# Altium PCB GY-G11.PCBDOC (part 5 of 7)
Units mm, origin at the board's own origin, x right, y up, seen from the top; angles counter-clockwise.
Board outline 170.4 x 114.15 mm, 2 copper layers (Top Layer, Bottom Layer); 364 components, 260 nets, 1285 pads, 753 vias.
Unrouted connection lines stored in the file: 2.
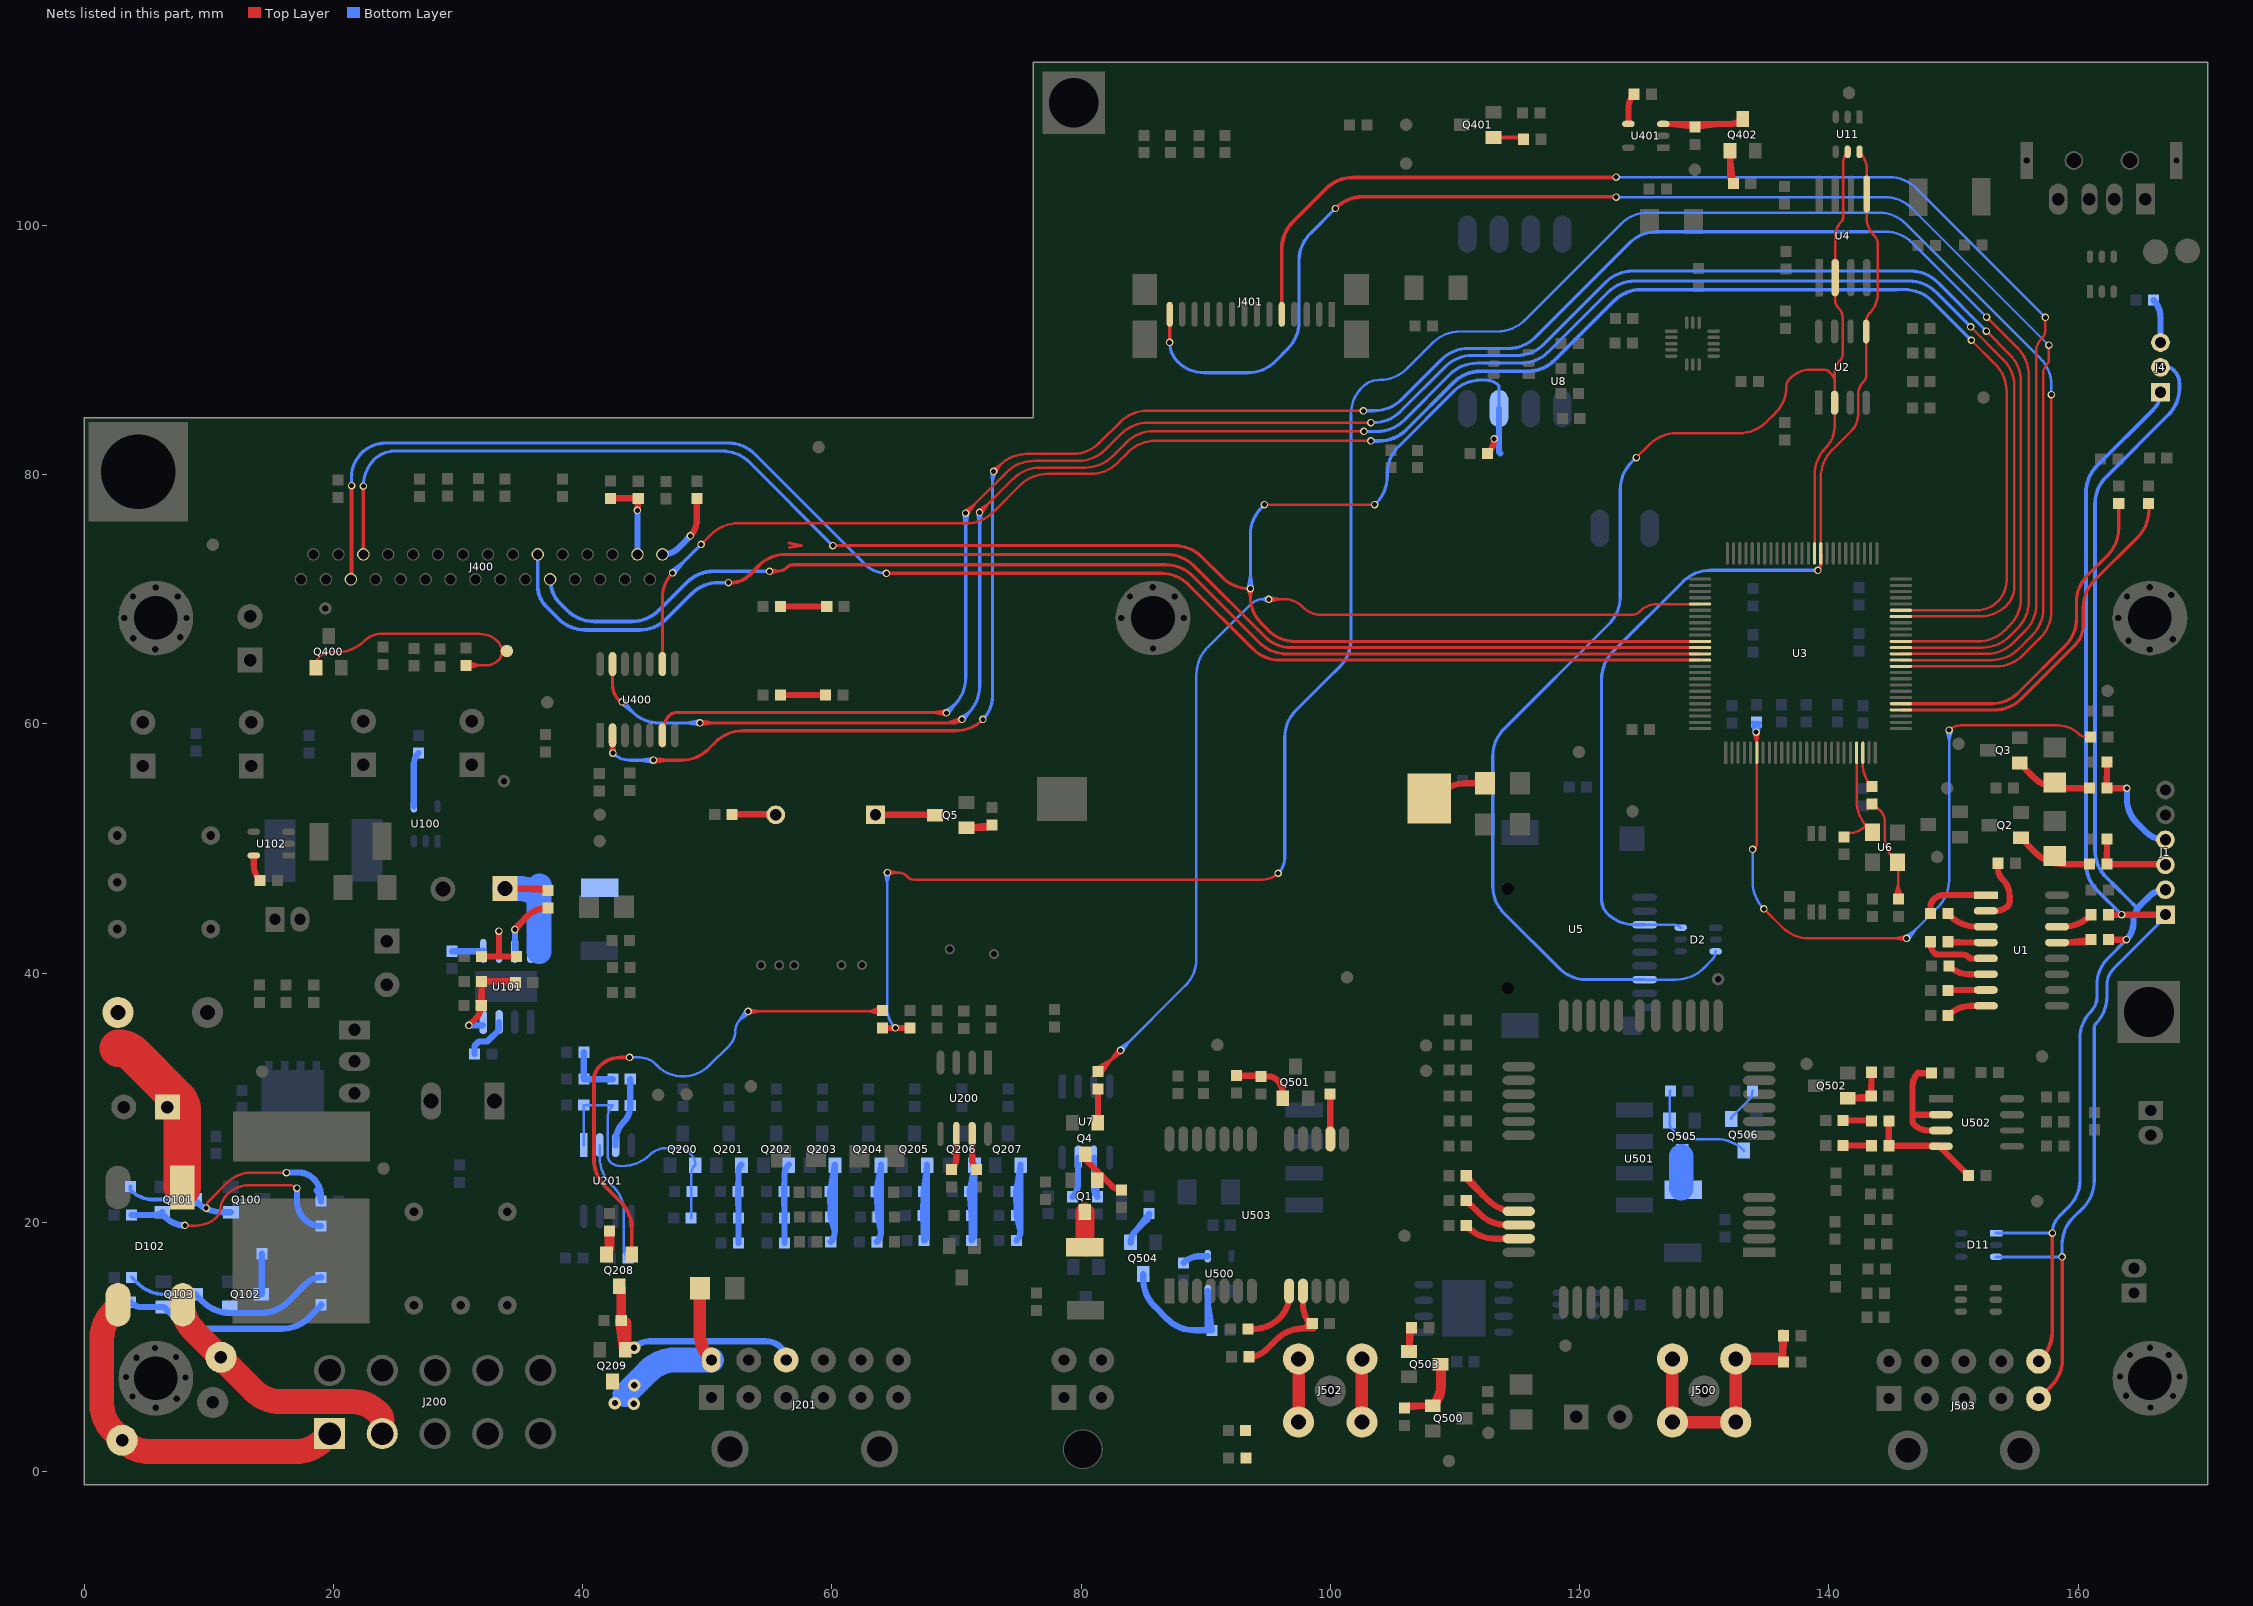
[diagram p5: the nets of this part, all layers, seen from the top]

## Via types
v1: diameter 0.6, hole 0.4, Top Layer to Bottom Layer, 620 vias
v2: diameter 0.8, hole 0.5, Top Layer to Bottom Layer, 121 vias
v3: diameter 1, hole 0.5, Top Layer to Bottom Layer, 10 vias
v4: diameter 1.27, hole 0.711, Top Layer to Bottom Layer, 2 vias

## Nets (pads, with @x,y where several pads share a name; then routed paths per layer and width w, separated by ;. In a path a pad name is that pad's centre, name@x,y a point inside that pad or via, vN(x,y) a via of type N, cw(c..) or ccw(c..) an arc to the next point about the centre after c; other vN are vias at no path point) (continued)
MCOA1: U3.39 U400.2 | length 188.9
  Top Layer w0.2: v1@72.859,80.42 73.492,80.772 ; v1(72.98,80.26) 73.492,80.772 ; v1@73.14,80.139 73.492,80.772 ; v1(102.651,85.13) 85.31,85.13 ccw(c85.31,82.064) 83.142,84.232 81.478,82.568 cw(c79.31,84.736) 79.31,81.67 75.66,81.67 ccw(c75.66,78.604) 73.492,80.772 ; U3.39@145.776,66.124 152.312,66.124 ccw(c152.312,69.19) 154.48,67.022 155.131,67.672 ccw(c152.963,69.84) 156.029,69.84 156.029,88 ccw(c152.963,88) 155.131,90.168 v1(152.65,92.648)
  Top Layer w0.254: v1@42.247,57.67 U400.2@42.394,58.723 ; v1@42.394,57.722 U400.2@42.394,59.093 ; v1(42.42,57.66) U400.2@42.394,58.723 ; v1@42.592,57.678 U400.2@42.394,58.723 ; v1(45.68,57.09) 47.93,57.09 ccw(c47.93,60.156) 50.098,57.988 50.662,58.552 cw(c52.83,56.384) 52.83,59.45 69.93,59.45 ccw(c69.93,62.516) 72.098,60.348 v1(72.11,60.36) ; v1@45.694,56.918 46.742,57.09 v1@45.694,57.262
  Bottom Layer w0.2: v1@72.794,80.342 72.88,79.43 v1@73.164,80.252 ; 143.08,99.5 144.528,99.5 cw(c144.528,96.434) 146.696,98.602 v1(152.65,92.648)
  Bottom Layer w0.254: v1(42.42,57.66) ccw(c43.796,59.036) 43.796,57.09 v1(45.68,57.09) ; v1@45.666,56.918 44.618,57.09 v1@45.666,57.262 ; v1@72.229,60.409 cw(c72.11,60.529) v1(72.11,60.36) ccw(c70.251,62.219) 72.88,62.219 72.88,79.43 cw(c75.946,79.43) v1@72.993,80.256 ; v1(102.651,85.13) 103.52,85.13 ccw(c103.52,88.196) 105.688,86.028 108.893,89.232 cw(c111.061,87.064) 111.061,90.13 114.271,90.13 ccw(c114.271,93.196) 116.439,91.028 124.012,98.602 cw(c126.18,96.434) 126.18,99.5 143.08,99.5
MCOA2: U3.44 U400.13 | length 183.1
  Top Layer w0.2: v1@71.713,77.125 72.564,77.694 v1@71.995,76.843 ; v1(71.84,76.97) 74.542,79.672 cw(c76.71,77.504) 76.71,80.57 80.33,80.57 ccw(c80.33,83.636) 82.498,81.468 83.622,82.592 cw(c85.79,80.424) 85.79,83.49 102.643,83.49 cw(c102.643,83.423) v1(102.691,83.47) ; U3.44@145.776,68.624 152.094,68.624 ccw(c152.094,71.69) 154.262,69.522 ccw(c152.769,71.015) 154.88,71.015 154.88,87.088 ccw(c151.814,87.088) 153.982,89.256 v1(151.37,91.868)
  Top Layer w0.254: U400.13@42.394,64.808 42.394,63.126 ccw(c44.086,63.126) 42.89,61.93 42.948,61.872 ccw(c43.17,62.094) v1(43.17,61.78) ; v1(49.4,60.08) 69.744,60.08 ccw(c69.744,61.036) v1(70.42,60.36) ; v1@49.414,59.908 50.462,60.08 v1@49.414,60.252 ; 69.3,60.08 v1@70.449,60.503
  Bottom Layer w0.254: v1@43.057,61.649 43.972,60.978 ; v1(43.17,61.78) 43.972,60.978 ; v1@43.301,61.893 43.972,60.978 ; v1@49.386,59.908 48.338,60.08 v1@49.386,60.252 ; v1(49.4,60.08) 46.14,60.08 cw(c46.14,63.146) 43.972,60.978 ; v1@70.312,60.495 70.962,60.902 ; v1(70.42,60.36) 70.962,60.902 ; v1@70.555,60.252 70.962,60.902 ; v1@71.668,76.953 71.86,75.907 ; v1(71.84,76.97) 71.86,75.907 ; v1@71.86,76.97 71.86,63.07 cw(c68.794,63.07) 70.962,60.902 ; v1@72.013,76.959 71.86,75.907 ; v1(102.691,83.47) 103.741,83.47 ccw(c103.741,86.536) 105.909,84.368 109.593,88.052 cw(c111.761,85.884) 111.761,88.95 115.311,88.95 ccw(c115.311,92.016) 117.479,89.848 122.272,94.642 cw(c124.44,92.474) 124.44,95.54 146.428,95.54 cw(c146.428,92.474) 148.596,94.642 v1(151.37,91.868)
MCOB1: U3.40 U400.6 | length 175.7
  Top Layer w0.2: v1@70.603,77.065 71.454,77.634 v1@70.885,76.783 ; v1(70.73,76.91) 74.032,80.212 cw(c76.2,78.044) 76.2,81.11 79.77,81.11 ccw(c79.77,84.176) 81.938,82.008 83.202,83.272 cw(c85.37,81.104) 85.37,84.17 v1(103.251,84.17) ; U3.40@145.776,66.624 151.962,66.624 ccw(c151.962,69.69) 154.13,67.522 154.501,67.892 ccw(c152.333,70.06) 155.399,70.06 155.399,87.49 ccw(c152.333,87.49) 154.501,89.658 v1(152.63,91.528)
  Top Layer w0.254: U400.6@46.394,59.093 46.394,59.296 cw(c48.394,59.296) 46.98,60.71 cw(c47.463,60.227) 47.463,60.91 v1@69.132,60.91 ; v1@69.163,60.718 68.117,60.91 ; v1@69.169,61.063 68.117,60.91 ; v1(69.18,60.89) 68.117,60.91
  Bottom Layer w0.254: v1@69.069,61.023 69.842,61.552 ; v1(69.18,60.89) 69.842,61.552 ; v1@69.313,60.779 69.842,61.552 ; v1@70.558,76.894 70.74,75.848 ; v1(70.73,76.91) 70.74,75.848 ; v1@70.74,76.91 70.74,63.72 cw(c67.674,63.72) 69.842,61.552 ; v1@70.903,76.898 70.74,75.848 ; v1(103.251,84.17) 103.44,84.17 ccw(c103.44,87.236) 105.608,85.068 109.213,88.672 cw(c111.381,86.504) 111.381,89.57 114.951,89.57 ccw(c114.951,92.636) 117.119,90.468 122.092,95.442 cw(c124.26,93.274) 124.26,96.34 146.548,96.34 cw(c146.548,93.274) 148.716,95.442 v1(152.63,91.528)
MCOB2: U3.45 U400.9 | length 154
  Top Layer w0.2: v1(49.51,74.41) 50.302,75.202 cw(c52.47,73.034) 52.47,76.1 70.78,76.1 ccw(c70.78,79.166) 72.948,76.998 75.112,79.162 cw(c77.28,76.994) 77.28,80.06 80.75,80.06 ccw(c80.75,83.126) 82.918,80.958 83.782,81.822 cw(c85.95,79.654) 85.95,82.72 103.227,82.72 cw(c103.227,82.687) v1(103.251,82.71) ; U3.45@145.776,69.124 151.845,69.124 ccw(c151.845,71.535) 153.55,69.83 ccw(c151.86,71.52) 154.25,71.52 154.25,86.688 ccw(c151.184,86.688) 153.352,88.856 v1(151.42,90.788)
  Top Layer w0.254: U400.9@46.394,64.808 46.394,70.127 cw(c49.213,70.127) v1(47.22,72.12)
  Bottom Layer w0.254: v1@47.107,72.251 48.059,72.959 v1@47.351,72.007 ; v1(47.22,72.12) v1(49.51,74.41) ; 145.39,94.85 146.088,94.85 cw(c146.088,91.784) 148.256,93.952 v1(151.42,90.788)
  Bottom Layer w0.3: v1(103.251,82.71) 103.921,82.71 ccw(c103.921,85.776) 106.089,83.608 109.883,87.402 cw(c112.051,85.234) 112.051,88.3 115.831,88.3 ccw(c115.831,91.366) 117.999,89.198 122.752,93.952 cw(c124.92,91.784) 124.92,94.85 145.39,94.85
MISO: D2.3 U2.2 U3.61 U4.2 U5.7 U11.5 | length 114.3
  Top Layer w0.2: v1(124.54,81.37) 125.602,82.432 cw(c127.77,80.264) 127.77,83.33 132.8,83.33 ccw(c132.8,86.396) 134.968,84.228 135.746,85.006 ccw(c133.731,87.02) 136.58,87.02 cw(c137.594,87.02) 136.877,87.737 cw(c138.526,86.088) 138.526,88.42 139.638,88.42 cw(c139.638,87.908) 140,88.27 140.211,88.059 cw(c139.632,87.48) 140.451,87.48 ; U3.61@138.846,73.684 138.846,79.97 cw(c141.973,79.97) 139.762,82.182 ccw(c138.098,83.845) 140.451,83.845 140.451,88.1 cw(c141.95,88.1) 140.89,89.16 ccw(c140.335,89.715) 141.12,89.715 141.12,92.474 ccw(c139.754,92.474) 140.72,93.44 cw(c141.271,93.991) 140.492,93.991 140.492,99.055 cw(c142.295,99.055) 141.02,100.33 ccw(c140.754,100.596) 141.13,100.596 141.13,105.019 cw(c142.384,105.019) U11.5@141.497,105.906
  Bottom Layer w0.2: U5.7@125.213,39.487 127.757,39.487 ccw(c127.757,42.553) 129.925,40.385 130.633,41.093 ccw(c129.975,41.752) D2.3@130.906,41.752
  Bottom Layer w0.254: v1(124.54,81.37) 124.148,80.978 ccw(c126.316,78.81) 123.25,78.81 123.25,70.19 cw(c120.184,70.19) 122.352,68.022 113.918,59.588 ccw(c116.086,57.42) 113.02,57.42 113.02,47 ccw(c116.086,47) 113.918,44.832 118.365,40.385 ccw(c120.533,42.553) 120.533,39.487 U5.7@125.213,39.487
MISO0: J401.14 U3.37 | length 123.4
  Top Layer w0.2: U3.37@145.776,65.124 153.062,65.124 ccw(c153.062,68.19) 155.23,66.022 156.301,67.092 ccw(c154.133,69.26) 157.199,69.26 157.199,88.107 cw(c158.329,88.107) 157.304,88.582 cw(c158.329,88.107) 157.53,88.906 ccw(c157.264,89.172) 157.64,89.172 v1(157.64,90.388)
  Top Layer w0.3: v1(87.1,90.61) ccw(c87.099,90.611) 87.101,90.611 J401.14@87.101,92.87 ; v1(100.39,101.36) 100.432,101.402 cw(c102.6,99.234) 102.6,102.3 v1@122.872,102.3
  Bottom Layer w0.2: v1(122.92,102.28) 144.478,102.28 cw(c144.478,99.214) 146.646,101.382 v1(157.64,90.388)
  Bottom Layer w0.254: v1(87.1,90.61) ccw(c89.297,90.61) 87.743,89.057 ccw(c89.86,91.173) 89.86,88.18 93.38,88.18 ccw(c93.38,91.246) 95.548,89.078 96.582,90.112 ccw(c94.414,92.28) 97.48,92.28 97.48,97.18 cw(c100.546,97.18) 98.378,99.348 v1(100.39,101.36)
MOSI: D2.6 U2.5 U3.60 U4.5 U5.3 U11.6 | length 81.6
  Top Layer w0.2: v1(139.11,72.33) v1@139.117,72.337 ; U3.60@139.35,73.673 ccw(c139.336,73.673) U3.60@139.346,73.684 139.346,79.78 cw(c142.473,79.78) 140.262,81.992 141.838,83.568 ccw(c140.626,84.78) 142.34,84.78 142.34,86.404 cw(c143.876,86.404) 142.79,87.49 ccw(c142.305,87.975) 142.991,87.975 142.991,92.314 cw(c143.876,92.314) 143.25,92.94 ccw(c141.632,94.558) 143.428,93.14 ccw(c141.632,94.558) 143.624,93.432 ccw(c141.632,94.558) 143.92,94.558 143.92,98.425 ccw(c142.725,98.425) 143.57,99.27 cw(c144.869,100.569) 143.032,100.569 U4.5@143.032,102.05 ; U11.6@142.45,105.906 cw(c141.044,104.501) 143.032,104.501 U4.5@143.032,102.514
  Top Layer w0.3: v1(139.11,72.33) ccw(c138.541,72.899) 139.117,72.337 ccw(c138.541,72.899) 139.346,72.899 U3.60@139.346,73.684
  Bottom Layer w0.2: U5.3@125.213,43.887 127.55,43.887 cw(c127.55,43.1) D2.6@128.106,43.657
  Bottom Layer w0.254: U5.3@125.213,43.887 124.393,43.887 cw(c124.393,46.953) 122.225,44.785 cw(c123.348,45.908) 121.76,45.908 121.76,63.62 cw(c124.826,63.62) 122.658,65.788 128.302,71.432 cw(c130.47,69.264) 130.47,72.33 v1(139.11,72.33)
MOSI0: J401.5 U3.38 | length 110.1
  Top Layer w0.2: U3.38@145.776,65.624 152.642,65.624 ccw(c152.642,68.69) 154.81,66.522 155.741,67.452 ccw(c153.573,69.62) 156.639,69.62 156.639,89.902 cw(c158.077,89.902) 157.06,90.918 ccw(c156.312,91.667) 157.129,90.995 ccw(c156.312,91.667) 157.236,91.152 ccw(c156.312,91.667) 157.37,91.667 v1(157.37,92.628)
  Top Layer w0.3: J401.5@96.101,92.87 96.101,98.131 cw(c99.167,98.131) 96.999,100.299 99.652,102.952 cw(c101.82,100.784) 101.82,103.85 122.872,103.85 ccw(c122.872,103.918) v1(122.92,103.87)
  Bottom Layer w0.2: v1(122.92,103.87) 144.858,103.87 cw(c144.858,100.804) 147.026,102.972 v1(157.37,92.628)
NetBT1_1: BT1.1 D10.1 | length 5.1
  Top Layer w0.5: BT1.1@107.928,54.021 BT1.1@108.28,54.372 ; BT1.1@108.22,53.87 108.685,54.335 cw(c110.853,52.167) 110.853,55.233 D10.1@112.399,55.233
NetC1_1: C1.1 U1.1 | length 5.5
  Top Layer w0.5: C1.1@148.142,44.778 148.142,45.335 cw(c148.955,45.335) 148.38,45.91 cw(c149.248,45.042) 149.248,46.269 U1.1@152.585,46.269
NetC1_2: C1.2 U1.3 | length 3.3
  Top Layer w0.5: C1.2@149.539,44.778 149.689,44.627 ccw(c151.857,46.795) 151.857,43.729 U1.3@152.585,43.729
NetC2_2: C2.2 U1.2 | length 5.6
  Top Layer w0.5: U1.2@152.585,44.999 153.383,44.999 ccw(c153.383,46.367) 154.35,45.4 ccw(c153.988,45.762) 154.5,45.762 154.5,46.168 ccw(c152.588,46.168) 153.94,47.52 cw(c154.854,48.434) 153.561,48.434 C2.2@153.561,48.822
NetC4_1: C4.1 U1.4 | length 5
  Top Layer w0.5: 151.508,42.459 C4.1@149.558,42.522 ccw(c149.711,42.675) 149.711,42.459 U1.4@152.585,42.459
NetC4_2: C4.2 U1.5 | length 5.2
  Top Layer w0.5: C4.2@148.161,42.522 148.161,42.331 ccw(c149.181,42.331) 148.46,41.61 ccw(c148.726,41.876) 148.726,41.5 150.671,41.5 cw(c150.671,40.681) 151.25,41.26 ccw(c151.42,41.43) 151.42,41.189 U1.5@152.585,41.189
NetC6_2: C6.2 U1.6 | length 3.1
  Top Layer w0.5: C6.2@149.639,40.578 ccw(c151.228,42.167) 151.228,39.919 U1.6@152.585,39.919
NetC11_1: C11.1 R19.2 U3.6 | length 83.8
  Top Layer w0.2: v1@133.963,59.316 U3.6@134.216,58.441 ; v1@134.027,49.848 ccw(c132.722,50.576) 134.216,50.576 134.216,59.216 ccw(c134.026,59.216) v1(134.16,59.35) U3.6@134.216,58.441 ; v1@134.36,59.34 U3.6@134.216,58.441 ; v1(134.779,45.16) 136.251,43.688 ccw(c138.419,45.856) 138.419,42.79 v1(146.24,42.79) 145.34,42.79 ; v1@146.218,42.591 145.34,42.79 ; v1@146.218,42.989 145.34,42.79 ; v1(149.64,59.51) cw(c150.533,58.617) 150.533,59.88 158.394,59.88 cw(c158.394,57.524) 160.06,59.19 ccw(c160.649,59.779) 160.649,58.946 R19.2@160.997,58.946
  Bottom Layer w0.2: C11.1@133.834,60.161 v1@133.962,59.38 ; C11.1@133.84,60.074 v1(134.16,59.35) ; C11.1@133.842,60.062 v1@134.178,59.392 ; C11.1@133.867,59.992 v1@134.359,59.371 ; v1(133.88,49.93) 133.88,47.329 ccw(c136.946,47.329) v1@134.778,45.161 ; C11.1@134.034,60.128 v1@134.178,59.392 ; C11.1@134.033,60.132 v1(134.16,59.35) ; C11.1@134.035,60.168 v1@133.962,59.38 ; C11.1@134.041,60.096 v1@134.359,59.371 ; C11.1@134.312,60.09 v1@133.962,59.38 ; C11.1@134.321,60.125 v1(134.16,59.35) ; C11.1@134.321,60.128 v1@134.178,59.392 ; C11.1@134.321,60.162 v1@134.359,59.371 ; C11.1@134.481,59.978 v1@133.962,59.38 ; C11.1@134.512,60.059 v1(134.16,59.35) ; C11.1@134.513,60.062 v1@134.178,59.392 ; C11.1@134.522,60.146 v1@134.359,59.371 ; v1@146.113,42.945 146.964,43.514 v1@146.395,42.663 ; v1(146.24,42.79) 148.742,45.292 ccw(c146.574,47.46) 149.64,47.46 v1(149.64,59.51) ; v1@149.441,59.488 149.64,58.61 v1@149.839,59.488 ; v1@133.962,59.38 C11.1@134.178,60.142 ; v1@133.962,59.38 C11.1@134.178,60.142 ; v1(134.16,59.35) C11.1@134.178,60.142 ; v1(134.16,59.35) C11.1@134.178,60.142 ; v1@134.178,59.392 C11.1@134.178,60.142 ; v1@134.178,59.392 C11.1@134.178,60.142 ; C11.1@134.178,60.142 v1@134.359,59.371
NetC29_1: C29.1 R36.2 U6.1 | length 14.2
  Top Layer w0.2: R36.2@143.609,53.231 cw(c143.959,53.581) R36.2@143.464,53.581 cw(c143.464,53.28) 143.677,53.493 144.11,53.06 cw(c143.217,52.167) 144.48,52.167 144.48,51.011 ccw(c147.211,51.011) 145.28,49.08 cw(c144.562,48.362) 145.578,48.362 C29.1@145.578,45.958 ; C29.1@145.235,45.994 145.513,47.008 ; C29.1@145.433,45.959 145.513,47.008 ; C29.1@145.513,46.115 ccw(c145.734,46.115) C29.1@145.578,45.958 ; C29.1@145.721,45.977 145.513,47.008 ; C29.1@145.913,46.036 145.513,47.008 ; 145.513,47.008 C29.1@145.578,45.958
NetC30_2: C30.2 U3.22 U6.3 | length 8.7
  Top Layer w0.2: C30.2@141.222,51.239 141.561,51.239 ccw(c141.561,53.189) U6.3@142.94,51.81 ; U3.22@142.216,57.694 142.216,53.86 ccw(c145.282,53.86) 143.114,51.692 U6.3@143.513,51.293
NetC100_1: C100.1 U101.7 | length 8.1
  Top Layer w0.5: C100.1@37.222,45.242 ccw(c37.222,42.801) 35.497,44.527 ; 35.497,44.527 v1(34.56,43.49) cw(c34.801,43.49) 34.631,43.661 35.497,44.527
  Bottom Layer w0.5: v1(34.56,43.49) cw(c34.554,43.484) 34.563,43.484 U101.7@34.563,41.793 v1(34.56,43.49)
NetC100_2: C100.2 D100.2 L102.1 U101.8 | length 13.3
  Top Layer w0.5: L102.1@33.768,46.782 36.876,46.782 cw(c36.876,46.293) C100.2@37.222,46.639 35.217,46.782
  Bottom Layer w2: L102.1@33.768,46.782 35.093,46.782 cw(c35.093,45.273) 36.16,46.34 ; 36.5,41.72 36.5,46.869 cw(c36.671,46.869) 36.55,46.99
NetC104_1: C104.1 U101.5 | length 2.5
  Bottom Layer w0.5: C104.1@29.522,41.758 31.938,41.758 ccw(c31.938,41.877) U101.5@32.023,41.793
NetC115_2: C115.2 U100.4 | length 4.4
  Bottom Layer w0.5: U100.4@26.452,53.394 26.452,56.766 cw(c27.718,56.766) C115.2@26.822,57.661
NetC120_1: C120.1 D102.1 F100.1 | length 15.5
  Top Layer w3: 2.721,33.992 cw(c2.721,32.191) 3.994,33.464 7.439,30.02 cw(c6.403,28.984) 7.868,28.984 D102.1@7.868,22.802
  Bottom Layer w0.5: C120.1@6.86,28.9 cw(c6.739,28.779) 6.91,28.779 6.91,27.01
NetC123_1: C123.1 R106.1 R107.2 U101.4 | length 12.8
  Top Layer w0.5: v1(30.87,35.81) 31.417,36.357 ccw(c30.352,37.422) C123.1@31.858,37.422 ; 32.636,39.346 R107.2@34.597,39.246 ccw(c34.356,39.005) 34.356,39.346 R106.1@31.894,39.346 ; C123.1@31.858,37.422 ccw(c31.772,37.509) 31.894,37.509 R106.1@31.894,39.346 ; C123.1@31.858,37.422 R106.1@31.894,39.346
  Bottom Layer w0.5: v1(30.87,35.81) cw(c30.918,35.762) 30.918,35.83 31.99,35.83 v1(30.87,35.81)
NetC203_1: C203.1 Q200.1 R212.1 R223.2 R237.1 U201.1 | length 22.6
  Bottom Layer w0.2: U201.1@40.101,26.201 cw(c40.144,26.244) 40.083,26.244 R212.1@40.083,29.414 ccw(c40.128,29.459) 40.128,29.395 R237.1@42.417,29.395 ccw(c43.425,28.387) 41.999,28.387 41.999,25.367 ccw(c42.716,25.367) 42.209,24.86 ccw(c43.006,25.657) 43.006,24.53 43.209,24.53 ccw(c43.209,27.596) 45.377,25.428 cw(c46.637,24.168) 46.637,25.95 47.592,25.95 cw(c47.592,24.437) 48.662,25.507 cw(c47.78,24.624) 49.028,24.624 ccw(c49.812,23.84) 48.703,23.84 R223.2@48.703,20.346
NetC204_1: C204.1 Q201.1 R214.2 R225.2 | length 13.8
  Bottom Layer w0.5: C204.1@52.463,22.29 R225.2@52.503,20.346 R214.2@52.503,18.401 ; R214.2@52.503,18.346 Q201.1@52.503,24.082 ; R225.2@52.503,20.531 C204.1@52.458,22.478 Q201.1@52.503,24.082 ; Q201.1@52.728,24.624 ccw(c53.27,24.082) Q201.1@52.503,24.082
NetC205_1: C205.1 Q202.1 R216.2 R228.2 | length 15.5
  Bottom Layer w0.5: C205.1@56.163,22.29 R228.2@56.203,20.346 R216.2@56.203,18.401 ; R228.2@56.203,20.29 R216.2@56.203,18.346 56.203,23.84 ; R228.2@56.203,20.531 C205.1@56.158,22.478 56.203,23.84 ; Q202.1@56.528,24.624 ccw(c57.312,23.84) 56.203,23.84
NetC206_1: C206.1 Q203.1 R218.2 R229.2 | length 15.7
  Bottom Layer w0.5: C206.1@59.86,22.466 R229.2@59.903,20.446 ; R218.2@59.903,18.446 ccw(c59.119,19.23) 60.228,19.23 ; R229.2@60.228,20.431 C206.1@59.858,22.478 Q203.1@60.228,24.51 ; C206.1@60.228,22.477 R229.2@59.903,20.446 ; Q203.1@60.228,24.624 60.228,19.23 ; R229.2@59.903,20.446 60.228,19.23
NetC207_1: C207.1 Q204.1 R219.2 R230.2 | length 15.6
  Bottom Layer w0.5: C207.1@63.568,22.425 R230.2@63.703,20.446 ; R219.2@63.603,18.446 ccw(c62.819,19.23) 63.928,19.23 ; R230.2@63.928,20.431 C207.1@63.558,22.478 Q204.1@63.928,24.51 ; C207.1@63.928,22.434 R230.2@63.703,20.446 ; Q204.1@63.928,24.624 63.928,19.23 ; R230.2@63.703,20.446 63.928,19.23
NetC208_1: C208.1 Q205.1 R220.2 R231.2 | length 20.2
  Bottom Layer w0.5: R231.2@67.628,20.475 C208.1@67.358,22.478 ; R231.2@67.628,20.537 R220.2@67.403,18.546 ; C208.1@67.628,22.576 R231.2@67.303,20.546 ; Q205.1@67.628,24.471 C208.1@67.358,22.478 ; Q205.1@67.628,24.624 67.628,19.089 ; R231.2@67.303,20.546 C208.1@67.358,22.478 ; R231.2@67.303,20.546 67.628,19.089 ; R231.2@67.303,20.546 R220.2@67.403,18.546 ; R220.2@67.403,18.546 ccw(c66.86,19.089) 67.628,19.089 ; R220.2@67.403,18.546 67.628,19.089
NetC209_1: C209.1 Q206.1 R221.1 R232.2 | length 20.3
  Bottom Layer w0.5: R221.1@71.195,18.561 R232.2@71.203,20.546 ; R232.2@71.428,20.43 C209.1@71.058,22.478 ; R232.2@71.428,20.548 R221.1@71.194,18.554 ; C209.1@71.428,22.533 R232.2@71.203,20.546 ; Q206.1@71.428,24.51 C209.1@71.058,22.478 ; Q206.1@71.428,24.624 71.428,19.118 ; C209.1@71.058,22.478 R232.2@71.203,20.546 ; R221.1@71.194,18.554 ccw(c70.63,19.118) 71.428,19.118 ; R221.1@71.194,18.554 71.428,19.118 ; R232.2@71.203,20.546 71.428,19.118
NetC210_1: C210.1 Q207.1 R222.2 R233.2 | length 15.6
  Bottom Layer w0.5: R222.2@74.803,18.546 ccw(c74.019,19.33) 75.128,19.33 ; R233.2@75.128,20.431 C210.1@74.758,22.478 ; C210.1@75.128,22.576 R233.2@74.803,20.546 ; Q207.1@75.128,24.51 C210.1@74.758,22.478 ; Q207.1@75.128,24.624 75.128,19.33 ; C210.1@74.758,22.478 R233.2@74.803,20.546 ; R233.2@74.803,20.546 75.128,19.33
NetC408_2: C408.2 U401.4 | length 2.5
  Top Layer w0.5: U401.4@123.906,108.148 123.906,109.406 cw(c125.49,109.406) C408.2@124.37,110.526
NetC502_1: C502.1 L505.2 U503.9 | length 9.9
  Top Layer w0.5: C502.1@93.458,9.222 ccw(c93.458,11.188) 94.848,9.798 95.644,10.594 cw(c97.812,8.426) 97.812,11.492 ; U503.9@97.79,14.494 97.79,13.512 ccw(c100.647,13.512) 98.627,11.492 97.812,11.492 ; L505.2@98.537,11.892 97.812,11.492
NetC505_1: C505.1 U500.4 | length 2.1
  Bottom Layer w0.5: C505.1@88.222,16.758 cw(c89.516,15.465) 89.516,17.294 U500.4@90.152,17.294
NetC520_2: C520.2 R505.1 | length 4.2
  Top Layer w0.5: C520.2@141.139,26.178 143.349,26.178 cw(c143.349,26.097) R505.1@143.406,26.154 C520.2@141.461,26.178
NetC522_2: C522.2 R506.1 | length 4.2
  Top Layer w0.5: C522.2@141.139,28.178 143.349,28.178 cw(c143.349,28.097) R506.1@143.406,28.154 C522.2@141.461,28.178
NetC523_1: C523.1 U502.2 U502.3 | length 9.9
  Top Layer w0.5: 146.71,28.65 ccw(c146.712,28.652) 146.712,28.649 U502.2@148.977,28.649 ; C523.1@148.242,31.978 147.228,31.978 cw(c147.228,32.088) 147.15,32.01 ccw(c148.212,30.948) 146.71,30.948 146.71,28.15 ccw(c147.12,28.15) 146.83,27.86 ccw(c147.991,29.021) 147.991,27.379 U502.3@148.977,27.379
NetD4_2: D4.2 Q2.1 R17.2 | length 6.3
  Top Layer w0.5: Q2.1@155.376,50.872 156.604,49.644 ccw(c158.772,51.812) 158.772,48.746 R17.2@160.897,48.746
NetD5_2: D5.2 Q3.1 R18.2 | length 6.3
  Top Layer w0.5: Q3.1@155.276,56.872 156.404,55.744 ccw(c158.572,57.912) 158.572,54.846 R18.2@160.897,54.846
NetD8_1: D8.1 R34.2 | length 3.7
  Top Layer w0.5: D8.1@55.881,69.43 R34.2@59.584,69.43
NetD9_1: D9.1 R35.2 | length 3.6
  Top Layer w0.5: D9.1@55.881,62.33 R35.2@59.484,62.33
NetF1_2: F1.2 Q1.3 | length 2.8
  Top Layer w1.5: Q1.3@80.285,20.845 cw(c80.252,20.812) 80.298,20.812 F1.2@80.298,18.009
NetF500_2: F500.2 Q505.3 | length 2.5
  Bottom Layer w2: F500.2@128.15,22.76 Q505.3@128.15,25.29
NetJ4_3: J4.3 L7.1 | length 3.6
  Bottom Layer w0.5: L7.1@166.034,94.008 cw(c164.657,92.631) 166.604,92.631 J4.3@166.604,90.607
NetJ400_1: J400.1 R400.2 | length 10
  Top Layer w0.5: v1(48.64,75.1) ccw(c47.388,76.352) 49.158,76.352 R400.2@49.158,78.077 ; 49.158,76.749 R400.2@49.158,78.077 ; R400.2@49.158,78.077 49.13,76.68 R400.2@49.158,78.077
  Bottom Layer w0.5: J400.1@46.4,73.6 ccw(c46.4,75.459) 47.714,74.144 48.338,74.768 ccw(c46.426,76.68) v1@48.627,75.109
NetJ500_2: J500.2 L500.1 L501.1 | length 30
  Top Layer w0.5: 134.37,9.058 L500.1@136.366,8.808 ; L501.1@136.23,10.797 L500.1@136.366,8.808 ; L501.1@136.23,11.22 L500.1@136.23,9.137 ; L500.1@136.357,8.941 L501.1@136.366,10.908 L500.1@136.23,9.137 ; L500.1@136.23,9.137 ccw(c136.695,9.137) L500.1@136.366,8.808 ; L500.1@136.366,8.808 ccw(c135.763,8.205) 135.763,9.058 L500.1@136.366,8.808
  Top Layer w1: J500.2@127.442,9.058 J500.2@127.442,3.978 J500.2@132.522,3.978 J500.2@132.522,9.058 135.763,9.058
NetJ502_2: J502.2 L502.1 L503.1 | length 10.1
  Top Layer w0.5: J502.2@97.442,4.573 ccw(c98.083,4.573) J502.2@97.63,4.12
  Top Layer w1: J502.2@97.442,4.573 J502.2@97.442,9.058 ; J502.2@102.522,3.978 J502.2@102.522,9.058
NetL1_2: L1.2 U1.14 | length 3
  Top Layer w0.5: U1.14@158.3,43.729 158.804,43.729 ccw(c158.804,46.795) 160.972,44.627 L1.2@161.037,44.692
NetL2_2: L2.2 U1.7 | length 5
  Top Layer w0.5: 151.509,38.649 L2.2@149.563,38.608 cw(c149.663,38.509) 149.663,38.649 U1.7@152.585,38.649
NetL3_2: L3.2 U1.13 | length 5.4
  Top Layer w0.5: U1.13@158.3,42.459 160.476,42.459 ; U1.13@159.052,42.459 L3.2@161.037,42.692 ; 160.476,42.459 ccw(c160.476,43.253) L3.2@161.037,42.692 ; 160.476,42.459 L3.2@161.037,42.692
NetL4_2: L4.2 U1.8 | length 3.2
  Top Layer w0.5: L4.2@149.563,36.608 cw(c151.425,34.746) 151.425,37.379 U1.8@152.585,37.379
NetL5_2: L5.2 U7.7 | length 3.3
  Bottom Layer w0.5: L5.2@79.308,22.063 ccw(c78.239,23.132) 79.751,23.132 U7.7@79.751,25.208
NetL6_2: L6.2 U7.6 | length 6
  Bottom Layer w0.5: 81.021,24.071 L6.2@81.308,22.063 ; U7.6@81.021,25.208 81.021,22.757 ; 81.021,22.757 ccw(c82.002,22.757) L6.2@81.308,22.063 ; 81.021,22.757 L6.2@81.308,22.063
NetL200_1: L200.1 U200.7 | length 3
  Top Layer w0.5: U200.7@71.249,27.108 71.249,25.101 ccw(c72.475,25.101) L200.1@71.608,24.234
NetL201_1: L201.1 U200.6 | length 3
  Top Layer w0.5: L201.1@69.608,24.234 ccw(c68.712,25.13) 69.979,25.13 U200.6@69.979,27.108
NetLS1_1: LS1.1 Q5.3 | length 4.8
  Top Layer w0.5: LS1.1@63.489,52.709 68.187,52.709 cw(c68.187,52.639) Q5.3@68.236,52.688
NetLS1_2: LS1.2 R14.1 | length 3.5
  Top Layer w0.5: R14.1@51.994,52.746 55.398,52.746 cw(c55.398,52.618) LS1.2@55.489,52.709
NetQ1_1: Q1.1 Q4.3 R11.2 | length 4.3
  Top Layer w0.5: Q4.3@80.323,25.467 ccw(c81.289,25.467) 80.581,24.81 ccw(c81.289,25.467) 80.606,24.784 82.463,22.927 ccw(c83.246,23.711) R11.2@83.246,22.603
NetQ4_1: Q4.1 R20.1 | length 2.7
  Top Layer w0.5: Q4.1@81.328,27.976 ccw(c81.284,28.02) 81.346,28.02 R20.1@81.346,30.706
NetQ5_1: Q5.1 R21.2 | length 4.7
  Top Layer w0.5: Q5.1@70.776,51.672 72.33,51.672 ; Q5.1@70.881,51.672 R21.2@72.858,51.891 ; 72.33,51.672 ccw(c72.33,52.419) R21.2@72.858,51.891 ; 72.33,51.672 R21.2@72.858,51.891
NetQ100_1: Q100.1 Q101.3 R104.1 R114.2 | length 21.8
  Top Layer w0.2: v1(9.789,21.15) 9.789,21.19 cw(c10.537,21.19) 10.008,21.719 11.479,23.19 cw(c13.41,21.259) 13.41,23.99 v1(16.219,23.99)
  Bottom Layer w0.3: R114.2@3.712,22.896 3.712,22.676 cw(c3.632,22.676) 3.689,22.62 ccw(c5.578,24.509) 5.578,21.838 Q101.3@8.808,21.838
  Bottom Layer w0.5: Q101.3@8.808,21.838 8.926,21.72 ccw(c11.094,23.888) 11.094,20.822 Q100.1@11.768,20.822 ; v1(16.219,23.99) cw(c16.243,23.966) 16.243,24 17.226,24 cw(c17.226,22.327) 18.409,23.51 cw(c16.994,22.095) 18.995,22.095 R104.1@18.995,21.706 ccw(c17.792,21.706) 18.643,22.556
NetQ101_1: Q101.1 R108.1 R109.2 | length 19.9
  Top Layer w0.2: v1(8.079,19.77) ccw(c8.127,19.818) 8.127,19.75 8.959,19.75 ccw(c8.959,22.14) 10.649,20.45 ccw(c9.997,21.102) 10.911,20.978 ccw(c9.997,21.102) 10.919,21.093 ; 10.919,21.14 10.919,21.102 cw(c9.997,21.102) 10.919,21.093 ; v1(17.069,22.75) ccw(c16.489,22.171) 16.489,22.99 13.255,22.99 ccw(c13.255,20.463) 11.469,22.25 ccw(c12.821,20.898) 10.919,21.093
  Bottom Layer w0.5: R109.2@3.792,20.606 6.061,20.606 cw(c6.061,19.925) 6.542,20.406 ccw(c8.079,21.943) v1(8.079,19.77) ; Q101.1@5.747,20.606 ccw(c5.747,21.342) Q101.1@6.268,20.822 ; v1(17.069,22.75) 17.069,21.754 ccw(c19.204,21.754) 17.694,20.245 ccw(c18.995,21.545) R108.1@18.995,19.706
NetQ102_1: Q102.1 Q103.3 R112.1 R115.2 | length 17.1
  Bottom Layer w0.3: R115.2@3.812,15.596 4.279,15.129 ccw(c6.447,17.297) 6.447,14.231 Q103.3@8.914,14.231
  Bottom Layer w0.5: Q103.3@8.914,14.231 cw(c8.914,14.174) 8.954,14.214 9.531,13.638 ccw(c11.699,15.806) 11.699,12.74 14.199,12.74 ccw(c14.199,15.806) 16.367,13.638 17.837,15.108 cw(c19.015,13.93) R112.1@19.015,15.596
NetQ102_3: Q102.3 R111.1 | length 3.3
  Bottom Layer w0.5: Q102.3@14.214,14.231 ccw(c14.122,14.324) 14.253,14.324 R111.1@14.253,17.486
NetQ103_1: Q103.1 R113.1 R116.2 | length 16.7
  Bottom Layer w0.5: R116.2@3.712,13.596 ccw(c4.632,14.516) 4.632,13.215 Q103.1@6.374,13.215 7.211,12.378 ccw(c9.379,14.546) 9.379,11.48 15.879,11.48 ccw(c15.879,14.546) 18.047,12.378 18.98,13.311 ccw(c18.895,13.396) R113.1@19.015,13.396
NetQ208_1: Q208.1 R211.2 | length 52.1
  Top Layer w0.2: v1(53.28,36.93) 63.87,36.93 ccw(c63.87,37.179) R211.2@64.046,37.003 62.992,36.93 ; v1@53.302,36.731 54.18,36.93 v1@53.302,37.129 ; R211.2@63.966,37.338 62.992,36.93 ; R211.2@64.013,36.66 62.992,36.93 ; R211.2@64.026,37.146 62.992,36.93 ; R211.2@64.046,36.858 62.992,36.93
  Top Layer w0.3: v1(43.759,33.24) 43.02,33.24 ccw(c43.02,30.918) 41.379,32.56 ccw(c42.538,31.401) 40.899,31.401 40.899,25.07 ccw(c43.965,25.07) 41.797,22.902 43.04,21.658 cw(c40.872,19.49) 43.938,19.49 Q208.1@43.938,17.421
  Bottom Layer w0.2: v1(43.759,33.24) 44.569,33.24 cw(c44.569,31.43) 45.849,32.71 46.004,32.555 ccw(c48.02,34.572) 48.02,31.72 ccw(c48.02,34.786) 50.188,32.618 51.744,34.174 ccw(c50.498,35.42) 52.26,35.42 cw(c53.443,35.42) 52.606,36.256 ; v1@53.125,37.056 52.606,36.256 ; v1@53.406,36.775 52.606,36.256 ; 52.606,36.256 v1(53.28,36.93) 52.606,36.256
NetQ208_2: Q208.2 R210.1 | length 3.3
  Top Layer w0.8: Q208.2@41.906,17.421 ccw(c41.328,17.999) Q208.2@42.146,17.999 ; Q208.2@42.146,17.999 R210.1@42.146,19.306 Q208.2@42.146,17.999
NetQ400_1: pad.13 Q400.1 R406.1 | length 24.5
  Top Layer w0.2: Q400.1@18.599,64.515 18.599,64.755 cw(c19.455,64.755) 18.85,65.36 cw(c19.84,64.37) 19.84,65.77 20.32,65.77 ccw(c20.32,68.836) 20.427,65.772 ccw(c20.32,68.836) 22.488,66.668 cw(c23.845,65.311) 23.845,67.23 31.693,67.23 cw(c31.693,65.113) 33.19,66.61 33.195,66.605 cw(c32.409,65.82) 33.52,65.82 33.52,65.757 cw(c32.609,65.757) 33.254,65.114 ; R406.1@30.646,64.706 32.27,64.706 ccw(c32.27,66.096) 33.253,65.113 ; R406.1@30.656,64.562 31.69,64.706 ; R406.1@30.656,64.85 31.69,64.706 ; R406.1@30.703,64.366 31.69,64.706 ; R406.1@30.703,65.046 31.69,64.706
NetQ401_1: Q401.1 R410.1 | length 2.5
  Top Layer w0.3: Q401.1@113.074,107.059 115.144,107.059 cw(c115.144,106.563) R410.1@115.495,106.914
NetQ402_1: Q402.1 R405.1 | length 5.4
  Top Layer w0.5: 132.072,105.351 R405.1@132.326,103.358 ; Q402.1@132.072,106.024 132.072,103.971 ; 132.072,103.971 ccw(c132.938,103.971) R405.1@132.326,103.358 ; 132.072,103.971 R405.1@132.326,103.358
NetQ402_3: Q402.3 R403.1 U401.3 | length 10.5
  Top Layer w0.5: U401.3@126.706,108.148 132.085,108.148 ccw(c132.085,109.568) Q402.3@133.088,108.564 ; 127.262,108.148 R403.1@129.254,107.894 131.248,108.148
NetQ500_1: Q500.1 Q503.3 R507.2 | length 8.3
  Top Layer w0.5: Q500.1@107.918,5.301 R507.2@105.946,5.103 ; Q500.1@108.215,5.301 106.423,5.301 ; R507.2@105.946,5.103 cw(c106.423,4.626) 106.423,5.301 ; R507.2@105.946,5.103 106.423,5.301
  Top Layer w0.8: Q500.1@108.215,5.301 ccw(c106.648,6.868) 108.864,6.868 Q503.3@108.864,8.612
NetQ501_1: Q501.1 R500.1 R501.2 | length 4.9
  Top Layer w0.5: R500.1@92.464,31.778 94.293,31.778 cw(c94.293,31.576) R501.2@94.436,31.719 95.037,31.719 cw(c95.037,30.767) 95.71,31.44 cw(c94.589,30.319) 96.174,30.319 Q501.1@96.174,29.969
NetQ502_1: Q502.1 R502.1 R503.2 | length 7.7
  Top Layer w0.5: R503.2@143.397,30.146 cw(c142.978,30.565) 142.978,29.972 141.476,29.972 R503.2@143.397,30.146 ; R503.2@143.397,30.146 ccw(c143.376,30.167) 143.406,30.167 R502.1@143.406,32.054 R503.2@143.397,30.146
NetQ503_1: Q503.1 R511.1 | length 3.9
  Top Layer w0.5: Q503.1@106.324,9.628 R511.1@106.506,11.554 ccw(c106.945,11.115) 106.324,11.115 Q503.1@106.324,9.628
NetQ504_1: Q504.1 R512.1 | length 5.2
  Bottom Layer w0.5: Q504.1@83.972,18.376 cw(c85.268,18.376) 84.352,19.292 ; 85.234,20.174 ccw(c84.701,20.706) R512.1@85.454,20.706 ; 84.352,19.292 R512.1@85.454,20.706 ; 84.352,19.292 85.234,20.174 R512.1@85.454,20.706
NetQ504_3: Q504.3 R508.1 U500.3 | length 14.8
  Bottom Layer w0.5: Q504.3@84.988,15.836 84.988,15.442 ccw(c88.054,15.442) 85.886,13.274 86.916,12.244 ccw(c89.084,14.412) 89.084,11.346 ; 90.05,11.346 ccw(c89.805,11.591) 90.152,11.591 U500.3@90.152,14.494 ; 90.152,13.455 R508.1@90.506,11.346 ; 89.084,11.346 R508.1@90.506,11.346 ; 89.084,11.346 R508.1@90.506,11.346
NetQ505_1: Q505.1 Q506.3 R523.2 | length 9.4
  Bottom Layer w0.2: R523.2@127.277,30.564 ccw(c127.444,30.397) 127.207,30.397 127.207,27.975 ccw(c127.865,27.975) 127.4,27.51 127.516,27.394 ccw(c129.24,29.118) 129.24,26.68 130.994,26.68 cw(c130.994,23.614) 133.162,25.782 Q506.3@133.177,25.767
NetQ506_1: Q506.1 R524.1 | length 2.9
  Bottom Layer w0.2: Q506.1@132.161,28.307 cw(c132.46,28.307) 132.248,28.518 133.576,29.846 ccw(c132.859,30.564) R524.1@133.874,30.564
NetR30_2: R30.2 U3.30 | length 27.8
  Top Layer w0.254: U3.30@145.776,61.624 153.044,61.624 ccw(c153.044,64.69) 155.212,62.522 158.962,66.272 ; 158.962,66.272 ccw(c156.794,68.44) 159.86,68.44 159.86,69.78 cw(c162.926,69.78) 160.758,71.948 162.356,73.546 ccw(c160.188,75.714) 163.254,75.714 R30.2@163.254,77.697
NetR31_2: R31.2 U3.29 | length 29.7
  Top Layer w0.254: U3.29@145.776,61.124 153.264,61.124 ccw(c153.264,64.19) 155.432,62.022 159.761,66.351 ; 159.81,66.47 cw(c159.641,66.47) 159.761,66.351 ; R31.2@165.67,77.81 165.67,77.15 cw(c162.604,77.15) 164.772,74.982 161.298,71.508 ccw(c163.466,69.34) 160.4,69.34 160.4,67.894 cw(c158.217,67.894) 159.761,66.351
NetR36_1: R36.1 U3.23 | length 2.9
  Top Layer w0.2: U3.23@142.716,57.694 142.716,56.784 ccw(c145.27,56.784) R36.1@143.464,54.978
NetR100_2: R100.2 R101.1 U101.6 | length 6.4
  Top Layer w0.5: R101.1@31.894,41.346 R100.2@34.697,41.346 ; 33.28,41.346 v1(33.28,43.37)
  Bottom Layer w0.5: v1(33.28,43.37) 33.28,41.823 ccw(c33.323,41.823) U101.6@33.293,41.793
NetR102_1: R102.1 U102.5 | length 2.1
  Top Layer w0.5: U102.5@13.606,49.443 13.606,48.661 ccw(c15.313,48.661) R102.1@14.106,47.454
NetR105_1: R105.1 U101.3 | length 3.8
  Bottom Layer w0.5: R105.1@31.319,33.53 31.319,34.169 31.67,34.52 32.34,34.52 33.293,35.473 U101.3@33.293,36.078
NetR237_2: R237.2 R240.2 U201.3 | length 5.6
  Bottom Layer w0.5: U201.3@42.641,26.201 42.641,26.481 cw(c44.887,26.481) 43.299,28.07 ccw(c42.056,29.313) 43.814,29.313 R240.2@43.814,31.495
NetR238_2: R238.2 U201.2 | length 9.9
  Bottom Layer w0.2: U201.2@41.371,26.201 41.371,25.218 ccw(c44.437,25.218) 42.269,23.05 42.474,22.845 cw(c40.478,20.85) 43.3,20.85 43.3,17.919 ccw(c44.409,17.919) R238.2@43.625,17.135
  Bottom Layer w0.5: R238.2@43.625,17.135 cw(c43.913,17.135) R238.2@43.709,17.339
NetR239_2: R239.2 R240.1 R242.1 | length 4.5
  Bottom Layer w0.5: R242.1@40.094,33.654 40.094,31.543 ccw(c40.161,31.543) R239.2@40.114,31.495 R240.1@42.417,31.495
NetR505_2: R505.2 R506.2 R510.1 U502.4 | length 11.6
  Top Layer w0.3: U502.4@148.862,26.154 cw(c148.862,25.999) U502.4@148.972,26.109
  Top Layer w0.5: R506.2@144.803,28.154 R505.2@144.803,26.154 U502.4@148.862,26.154 ; U502.4@148.972,26.109 ccw(c149.262,26.109) 149.057,25.903 R510.1@151.206,23.754 149.701,25.259
NetR509_1: R509.1 U503.8 | length 5.1
  Top Layer w0.5: R509.1@93.394,11.446 93.766,11.446 ccw(c93.766,14.512) 95.934,12.344 ccw(c94.109,14.169) 96.69,14.169 U503.8@96.69,14.494
NetR513_1: R513.1 U501.30 | length 4.5
  Top Layer w0.5: R513.1@110.894,19.746 111.044,19.596 ccw(c113.212,21.764) 113.212,18.698 U501.30@115.11,18.698
NetR514_1: R514.1 U501.29 | length 6.4
  Top Layer w0.5: U501.29@115.11,19.798 114.142,19.798 cw(c114.142,22.864) 111.974,20.696 ; 111.974,20.696 R514.1@110.894,21.746 cw(c110.894,21.673) 110.945,21.725 111.974,20.696
NetR515_1: R515.1 U501.28 | length 7.5
  Top Layer w0.5: 112.292,22.148 R515.1@110.894,23.746 ccw(c111.377,23.746) 111.035,23.405 112.644,21.796 ccw(c114.812,23.964) 114.812,20.898 U501.28@115.11,20.898
NetR522_2: R522.2 U503.14 | length 5.6
  Top Layer w0.5: U503.14@99.99,26.694 99.99,30.21 ccw(c99.867,30.21) R522.2@99.954,30.297 99.99,28.351
OC1: R204.2 R211.1 U3.36 | length 195.4
  Top Layer w0.2: v1(64.45,48.08) 65.32,48.08 ; v1@64.473,47.881 65.32,48.08 ; v1@64.473,48.279 65.32,48.08 ; v1(95.809,48.02) cw(c94.578,49.251) 94.578,47.51 66.577,47.51 cw(c66.577,48.227) 66.07,47.72 65.986,47.804 ccw(c65.32,47.138) 65.32,48.08 ; U3.36@145.776,64.624 153.412,64.624 ccw(c153.412,67.69) 155.58,65.522 156.951,66.892 ccw(c154.783,69.06) 157.849,69.06 v1(157.849,86.418)
  Top Layer w0.5: R211.1@64.31,35.606 R204.2@66.254,35.597 ; R204.2@65.99,35.598 R211.1@64.046,35.606 R204.2@66.233,35.606
  Bottom Layer w0.2: v1@64.251,48.064 64.42,47.178 ; v1@64.648,48.051 64.42,47.178 ; v1(65.09,35.606) cw(c66.708,37.223) 64.42,37.223 64.42,48.008 cw(c64.522,48.008) v1(64.45,48.08) 64.42,47.178 ; 101.641,84.853 cw(c104.7,84.853) 102.537,87.016 cw(c103.971,85.582) 103.971,87.61 ccw(c103.971,90.676) 106.139,88.508 108.223,90.592 cw(c110.391,88.424) 110.391,91.49 113.401,91.49 ccw(c113.401,94.556) 115.569,92.388 123.312,100.132 cw(c125.48,97.964) 125.48,101.03 144.008,101.03 cw(c144.008,97.964) 146.176,100.132 156.951,89.358 cw(c154.783,87.19) 157.849,87.19 v1(157.849,86.418)
  Bottom Layer w0.254: v1(95.809,48.02) ccw(c94.553,49.275) 96.329,49.275 96.329,58.91 cw(c99.395,58.91) 97.227,61.078 99.794,63.645 100.743,64.594 ccw(c98.575,66.762) 101.641,66.762 101.641,84.853
OUTCTRL: D204.1 J201.2 Q209.3 | length 14.1
  Top Layer w1: D204.1@49.288,14.603 D204.1@49.396,14.711 49.396,11.165 ccw(c52.462,11.165) 50.294,8.997 J201.2@50.327,8.964
  Bottom Layer w2: 43.41,6.21 45.266,8.066 cw(c47.434,5.898) 47.434,8.964 J201.2@50.327,8.964
  other v3: 44.1,5.46 42.59,5.51 44.132,6.932
OUTCTRL0: J201.6 Q208.3 Q209.1 R206.1 | length 20.5
  Top Layer w0.8: Q208.3@42.922,14.881 cw(c42.508,14.466) 43.094,14.466 R206.1@43.094,12.146
  Top Layer w1: R206.1@43.094,12.146 Q209.1@43.407,9.789 R206.1@43.407,11.925
  Bottom Layer w0.5: v3(44.12,9.94) cw(c45.375,8.685) 45.375,10.46 54.699,10.46 cw(c54.699,8.719) 55.93,9.95 cw(c54.972,8.992) 56.327,8.992 J201.6@56.327,8.964
PAPERDET: J400.3 R409.2 R412.1 | length 13.8
  Top Layer w0.5: R412.1@42.513,78.106 R409.2@44.458,78.077 ; R409.2@44.19,78.081 R412.1@42.246,78.106 44.428,78.106 cw(c44.428,77.778) 44.66,78.01 ccw(c44.498,77.848) R409.2@44.498,78.077 ; R409.2@44.458,78.077 ccw(c44.624,77.912) 44.39,77.912 v1(44.39,77.13) R409.2@44.458,78.077
  Bottom Layer w0.5: J400.3@44.4,73.6 44.4,77.106 ccw(c44.366,77.106) v1(44.39,77.13) 44.4,75.33
PC_DTR: J1.3 R4.2 R17.1 | length 8.9
  Top Layer w0.5: R4.2@162.303,50.69 R17.1@162.294,48.746 ; R4.2@162.303,50.754 162.303,48.767 cw(c162.273,48.767) R17.1@162.294,48.746 ; J1.3@167,48.7 ccw(c166.889,48.589) 166.889,48.746 R17.1@162.294,48.746
  Bottom Layer w0.5: J1.3@166.831,48.77 cw(c166.831,48.531) J1.3@167,48.7
PC_RTS: J1.4 R5.2 R18.1 | length 13
  Top Layer w0.5: R5.2@162.303,56.79 R18.1@162.294,54.846 ; R5.2@162.303,56.954 162.303,54.867 cw(c162.273,54.867) R18.1@162.294,54.846 ; R18.1@162.294,54.846 v1(163.91,54.84) ccw(c163.896,54.826) 163.896,54.846 R18.1@162.294,54.846
  Bottom Layer w0.5: v1(163.91,54.84) 163.91,53.977 ccw(c166.607,53.977) 164.7,52.07 165.412,51.358 ccw(c167,52.945) J1.4@167,50.7
PC_RXD: D11.3 J1.1 J4.1 J503.9 L1.1 | length 97.5
  Top Layer w0.3: J503.9@156.827,5.864 157.832,6.869 ccw(c155.664,9.037) 158.73,9.037 v1@158.73,17.24
  Top Layer w0.5: L1.1@162.434,44.692 166.98,44.692 ccw(c166.98,44.72) J1.1@167,44.7
  Bottom Layer w0.254: D11.3@153.412,17.241 158.709,17.241 cw(c158.709,17.239) v1(158.71,17.24) 158.71,18.23 cw(c161.776,18.23) 159.608,20.398 160.392,21.182 ccw(c158.224,23.35) 161.29,23.35 161.29,35.67 cw(c161.672,35.67) 161.402,35.94 ccw(c159.234,38.108) 162.3,38.108 162.3,39.008 cw(c164.255,39.008) 162.574,40.006 cw(c164.255,39.008) 162.873,40.391 166.872,44.39 ccw(c166.562,44.7) J1.1@167,44.7
  Bottom Layer w0.3: v1(163.489,44.692) 161.517,46.664 cw(c163.685,48.832) 160.619,48.832 160.619,78.552 cw(c163.685,78.552) 161.517,80.72 166.039,85.241 ccw(c164.673,86.607) J4.1@166.604,86.607
PC_TXD: D11.1 J1.2 J4.2 J503.10 L3.1 | length 95.8
  Top Layer w0.3: J503.10@156.827,8.864 157.013,9.05 ccw(c154.845,11.218) 157.911,11.218 ; 157.911,11.218 157.911,19.125 cw(c157.94,19.125) v1(157.919,19.146)
  Top Layer w0.5: L3.1@162.434,42.692 v1(163.87,42.692)
  Bottom Layer w0.254: D11.1@153.412,19.146 v1(157.919,19.146) ; v1@157.93,19.15 cw(c157.919,19.161) v1(157.919,19.146) ; v1(163.87,42.692) 162.398,41.22 ccw(c164.566,39.052) 161.5,39.052 161.5,38.072 cw(c159.923,38.072) 161.038,36.956 ccw(c163.206,34.788) 160.14,34.788 160.14,23.42 cw(c157.074,23.42) 159.242,21.252 158.473,20.483 ccw(c159.811,19.146) v1(157.919,19.146)
  Bottom Layer w0.3: 164.819,45.21 cw(c164.819,45.403) 164.792,45.212 cw(c164.819,45.403) 164.682,45.267 163.974,45.974 162.957,46.992 162.247,47.702 cw(c164.415,49.87) 161.349,49.87 161.349,77.659 cw(c164.415,77.659) 162.247,79.827 167.232,84.812 ccw(c165.064,86.98) 168.13,86.952 ccw(c165.064,86.98) 168.13,86.98 168.13,87.298 ccw(c166.628,87.298) 167.69,88.36 ccw(c167.094,87.764) 167.094,88.607 J4.2@166.604,88.607
  Bottom Layer w0.5: v1(163.87,42.692) ccw(c162.518,44.044) 164.43,44.044 cw(c166.497,44.044) 164.792,45.212 cw(c166.497,44.044) 165.035,45.505 165.686,46.156 cw(c167,44.841) J1.2@167,46.7
PPWR+: D102.3 J200.1 pad.7@3.05,2.52 | length 28.9
  Top Layer w2: D102.3@2.65,13.14 2.308,12.798 ccw(c4.476,10.63) 1.41,10.63 1.41,5.46 ccw(c4.476,5.46) 2.308,3.292 3.082,2.518 ccw(c5.25,4.686) 5.25,1.62 16.975,1.62 ccw(c16.975,4.686) 19.143,2.518 J200.1@19.688,3.062
PPWR-: D102.4 J200.3 pad.8@10.97,9.18 | length 21.4
  Top Layer w2: D102.4@7.908,13.402 ccw(c10.805,13.402) 8.756,11.354 13.582,6.528 ccw(c15.75,8.696) 15.75,5.63 21.44,5.63 cw(c21.44,2.564) 23.608,4.732 cw(c22.86,3.984) 23.918,3.984 J200.3@23.918,3.058
PRTCLOCK: J400.11 U3.87 | length 103.3
  Top Layer w0.254: 54.142,72.722 cw(c56.262,70.603) 56.262,73.6 86.86,73.6 cw(c86.86,70.534) 89.028,72.702 94.708,67.022 ccw(c96.876,69.19) 96.876,66.124 U3.87@129.656,66.124
  Top Layer w0.3: v1(51.7,71.34) 51.94,71.34 ccw(c51.94,73.32) 53.34,71.92 54.142,72.722
  Bottom Layer w0.3: J400.11@36.4,73.6 36.4,71.033 ccw(c38.653,71.033) 37.06,69.44 38.062,68.438 ccw(c40.23,70.606) 40.23,67.54 44.56,67.54 ccw(c44.56,70.606) 46.728,68.438 48.732,70.442 cw(c50.9,68.274) 50.9,71.34 ; 50.9,71.34 v1(51.7,71.34) 50.9,71.34
PRTDATAIN: J400.10 U3.88 | length 99.6
  Top Layer w0.254: v1(54.99,72.25) 55.627,72.25 ; v1@55.013,72.079 55.627,72.25 ; v1@55.013,72.421 55.627,72.25 ; U3.88@129.656,65.624 96.476,65.624 cw(c96.476,68.69) 94.308,66.522 88.958,71.872 ccw(c86.79,69.704) 86.79,72.77 56.883,72.77 ccw(c56.883,72.087) 56.4,72.57 cw(c55.627,73.343) 55.627,72.25
  Bottom Layer w0.3: J400.10@37.4,71.6 ccw(c40.152,71.6) 38.206,69.654 38.732,69.128 ccw(c40.9,71.296) 40.9,68.23 43.96,68.23 ccw(c43.96,71.296) 46.128,69.128 48.352,71.352 cw(c50.52,69.184) 50.52,72.25 v1(54.99,72.25)
PRTDATAOUT: J400.26 U3.89 | length 124.7
  Top Layer w0.254: v1(64.37,72.09) 86.42,72.09 cw(c86.42,69.024) 88.588,71.192 93.758,66.022 ccw(c95.926,68.19) 95.926,65.124 U3.89@129.656,65.124
  Top Layer w0.3: J400.26@21.394,71.609 ccw(c21.258,71.745) J400.26@21.4,71.616 ; J400.26@21.4,71.6 J400.26@21.4,71.616 ; v1(21.46,79.12) ccw(c21.484,79.096) 21.45,79.096 21.45,71.745 cw(c21.258,71.745) J400.26@21.4,71.616
  Bottom Layer w0.254: v1@21.45,79.12 21.45,79.813 cw(c24.147,79.813) 22.24,81.72 cw(c24.22,79.74) 24.22,82.54 51.66,82.54 cw(c51.66,79.474) 53.828,81.642 62.68,72.79 ccw(c64.37,74.48) v1(64.37,72.09)
PRTLAT: J400.25 R12.1 U3.86 U8.2 | length 167.9
  Top Layer w0.2: v1(94.7,77.59) v1(103.55,77.59)
  Top Layer w0.254: 56.556,74.522 57.55,74.31 56.582,74.147 ; v1(60.07,74.31) 87.489,74.31 cw(c87.489,71.244) 89.657,73.412 91.311,71.758 ccw(c93.479,73.926) 93.479,70.86 v1(93.579,70.86) ; v1@93.407,70.837 93.579,70.21 ; v1@93.75,70.837 93.579,70.21 ; U3.86@129.656,66.624 97.165,66.624 cw(c97.165,69.69) 94.997,67.522 94.477,68.042 cw(c96.645,70.21) 94.428,68.092 cw(c96.645,70.21) 93.579,70.21 ; 93.579,70.21 v1(93.579,70.86) ; 93.579,70.21 v1(93.579,70.86)
  Top Layer w0.3: J400.25@22.394,73.609 22.394,79.065 cw(c22.415,79.065) v1(22.4,79.08) ; J400.25@22.4,73.6 J400.25@22.4,73.609
  Top Layer w0.5: R12.1@112.595,81.716 112.704,81.825 ccw(c111.648,82.88) v1(113.141,82.88)
  Bottom Layer w0.254: v1(22.4,79.08) cw(c25.442,79.08) 23.291,81.231 cw(c24.882,79.64) 24.882,81.89 51.22,81.89 cw(c51.22,78.824) 53.388,80.992 v1(60.07,74.31) ; v1@93.406,70.874 93.579,71.922 v1@93.751,70.874 ; v1(93.579,70.86) 93.579,75.199 cw(c96.645,75.199) 94.477,77.367 v1(94.7,77.59) ; v1(103.55,77.59) v1@103.662,77.702 ; v1@103.662,77.702 ccw(c101.494,79.87) 104.56,79.87 104.56,80.09 cw(c107.626,80.09) 105.458,82.258 109.893,86.692 cw(c112.061,84.524) 112.061,87.59 112.467,87.59 cw(c112.467,86.156) 113.481,87.17 cw(c113.36,87.05) 113.53,87.05 113.53,83.821 cw(c112.2,83.821) v1(113.141,82.88)
  Bottom Layer w0.5: U8.2@113.53,85.298 113.53,81.936 ccw(c113.836,81.936) 113.62,81.72
PWRCAMERA: R20.2 U3.80 | length 90.4
  Top Layer w0.2: v1(95.05,70.002) 96.293,70.002 cw(c96.293,67.913) 97.77,69.39 ccw(c99.291,70.911) 99.291,68.76 124.172,68.76 ccw(c124.172,69.648) 124.8,69.02 cw(c126.257,67.563) 126.257,69.624 U3.80@129.656,69.624 ; v1@95.072,69.803 95.95,70.002 v1@95.072,70.2
  Top Layer w0.254: R20.2@81.163,32.362 82.372,33.022 ; R20.2@81.584,31.892 82.372,33.022 ; v1@83.029,33.923 82.321,32.971 v1@83.273,33.679 ; v1(83.16,33.81) 81.529,32.179 cw(c81.346,32.361) R20.2@81.346,32.103 82.372,33.022
  Bottom Layer w0.2: v1@83.033,33.965 83.884,34.534 v1@83.315,33.683 ; v1(83.16,33.81) 88.352,39.002 ccw(c86.184,41.17) 89.25,41.17 89.25,63.98 cw(c92.316,63.98) 90.148,66.148 93.61,69.61 cw(c94.556,68.664) 94.556,70.002 ; v1@95.01,69.806 94.556,70.002 ; v1@95.01,70.198 94.556,70.002 ; v1(95.05,70.002) 94.556,70.002